# Altium PCB пульт.PcbDoc
Units mm, origin at the board's own origin, x right, y up, seen from the top; angles counter-clockwise.
Board outline 62 x 73 mm, 2 copper layers (Top Layer, Bottom Layer); 34 components, 56 nets, 201 pads, 36 vias.
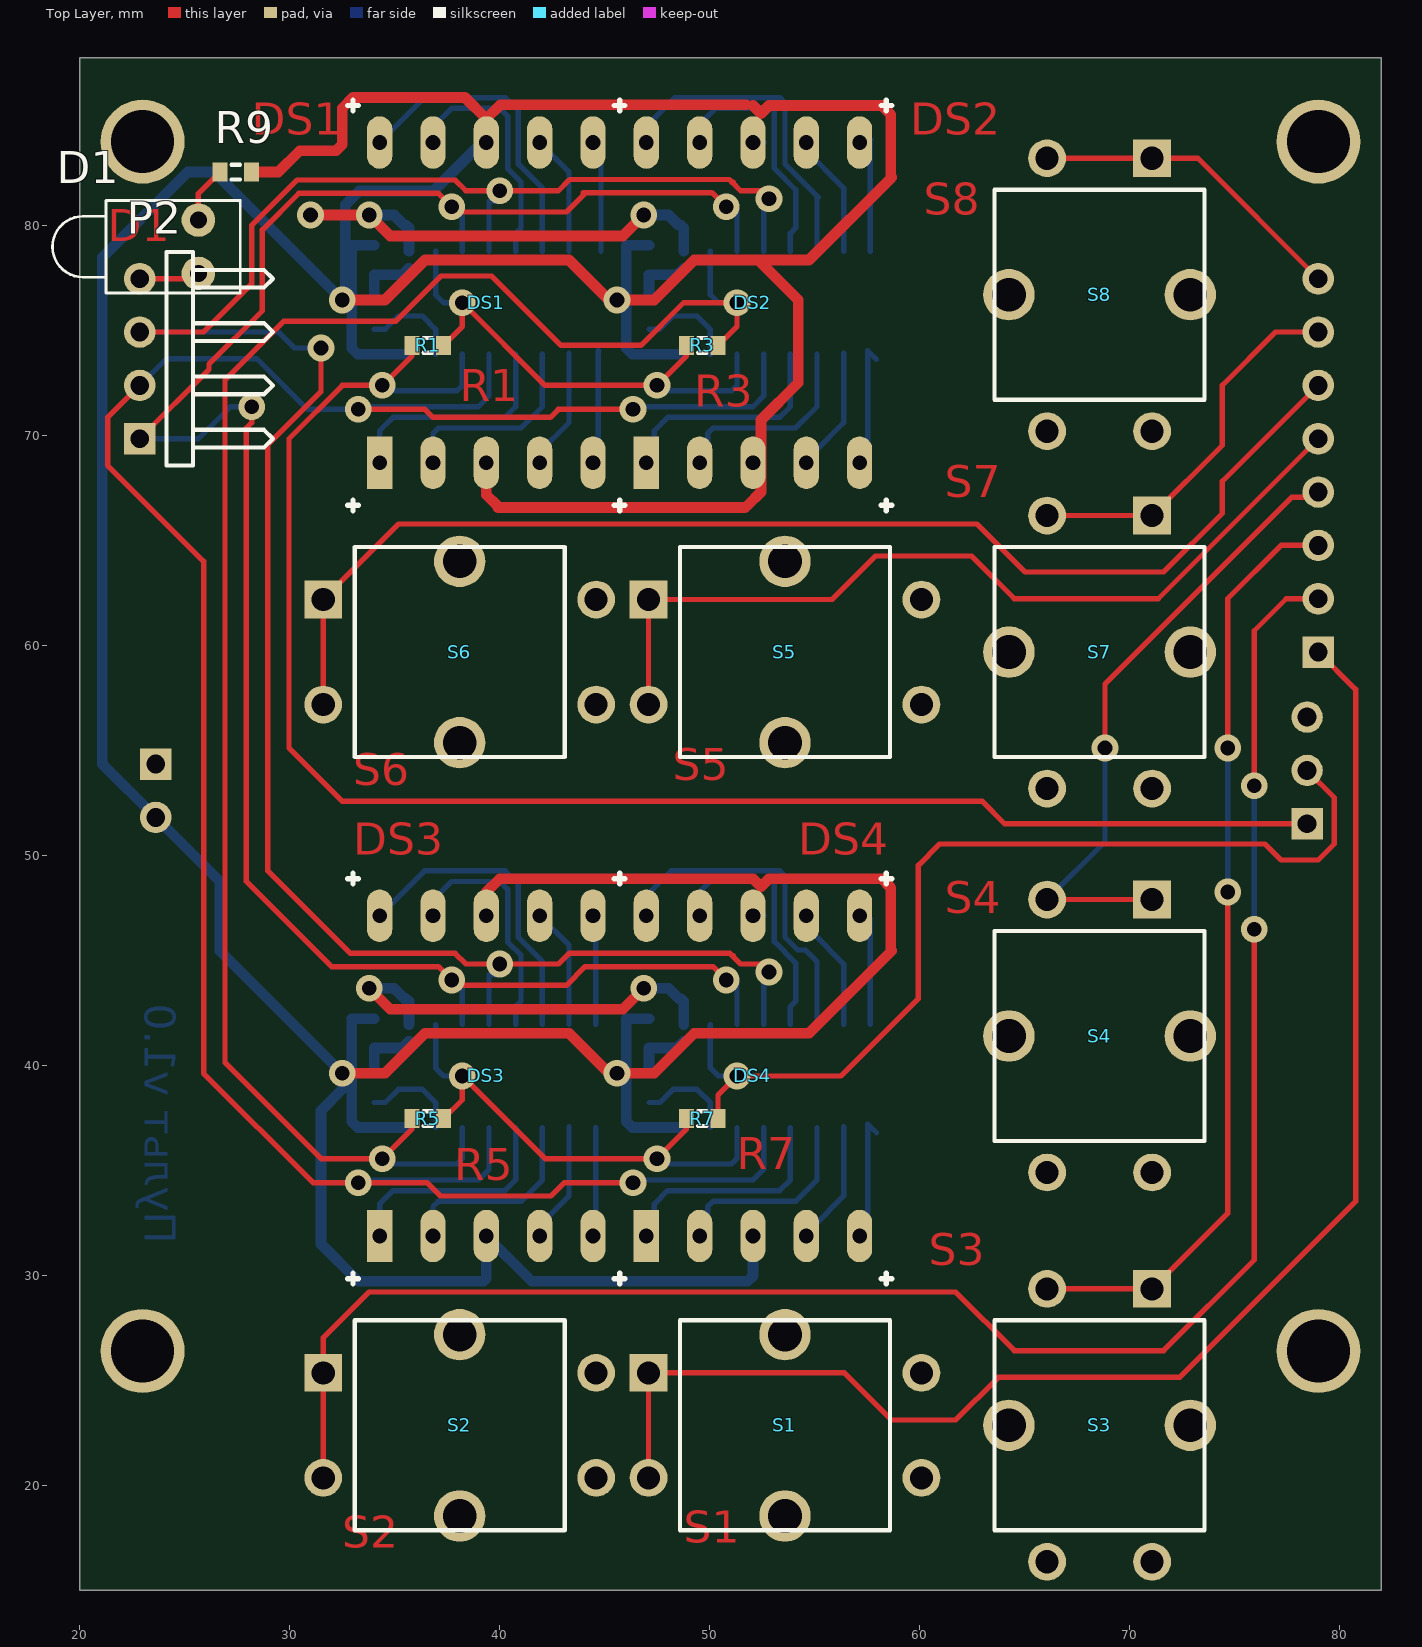
[diagram p0: Top Layer view]
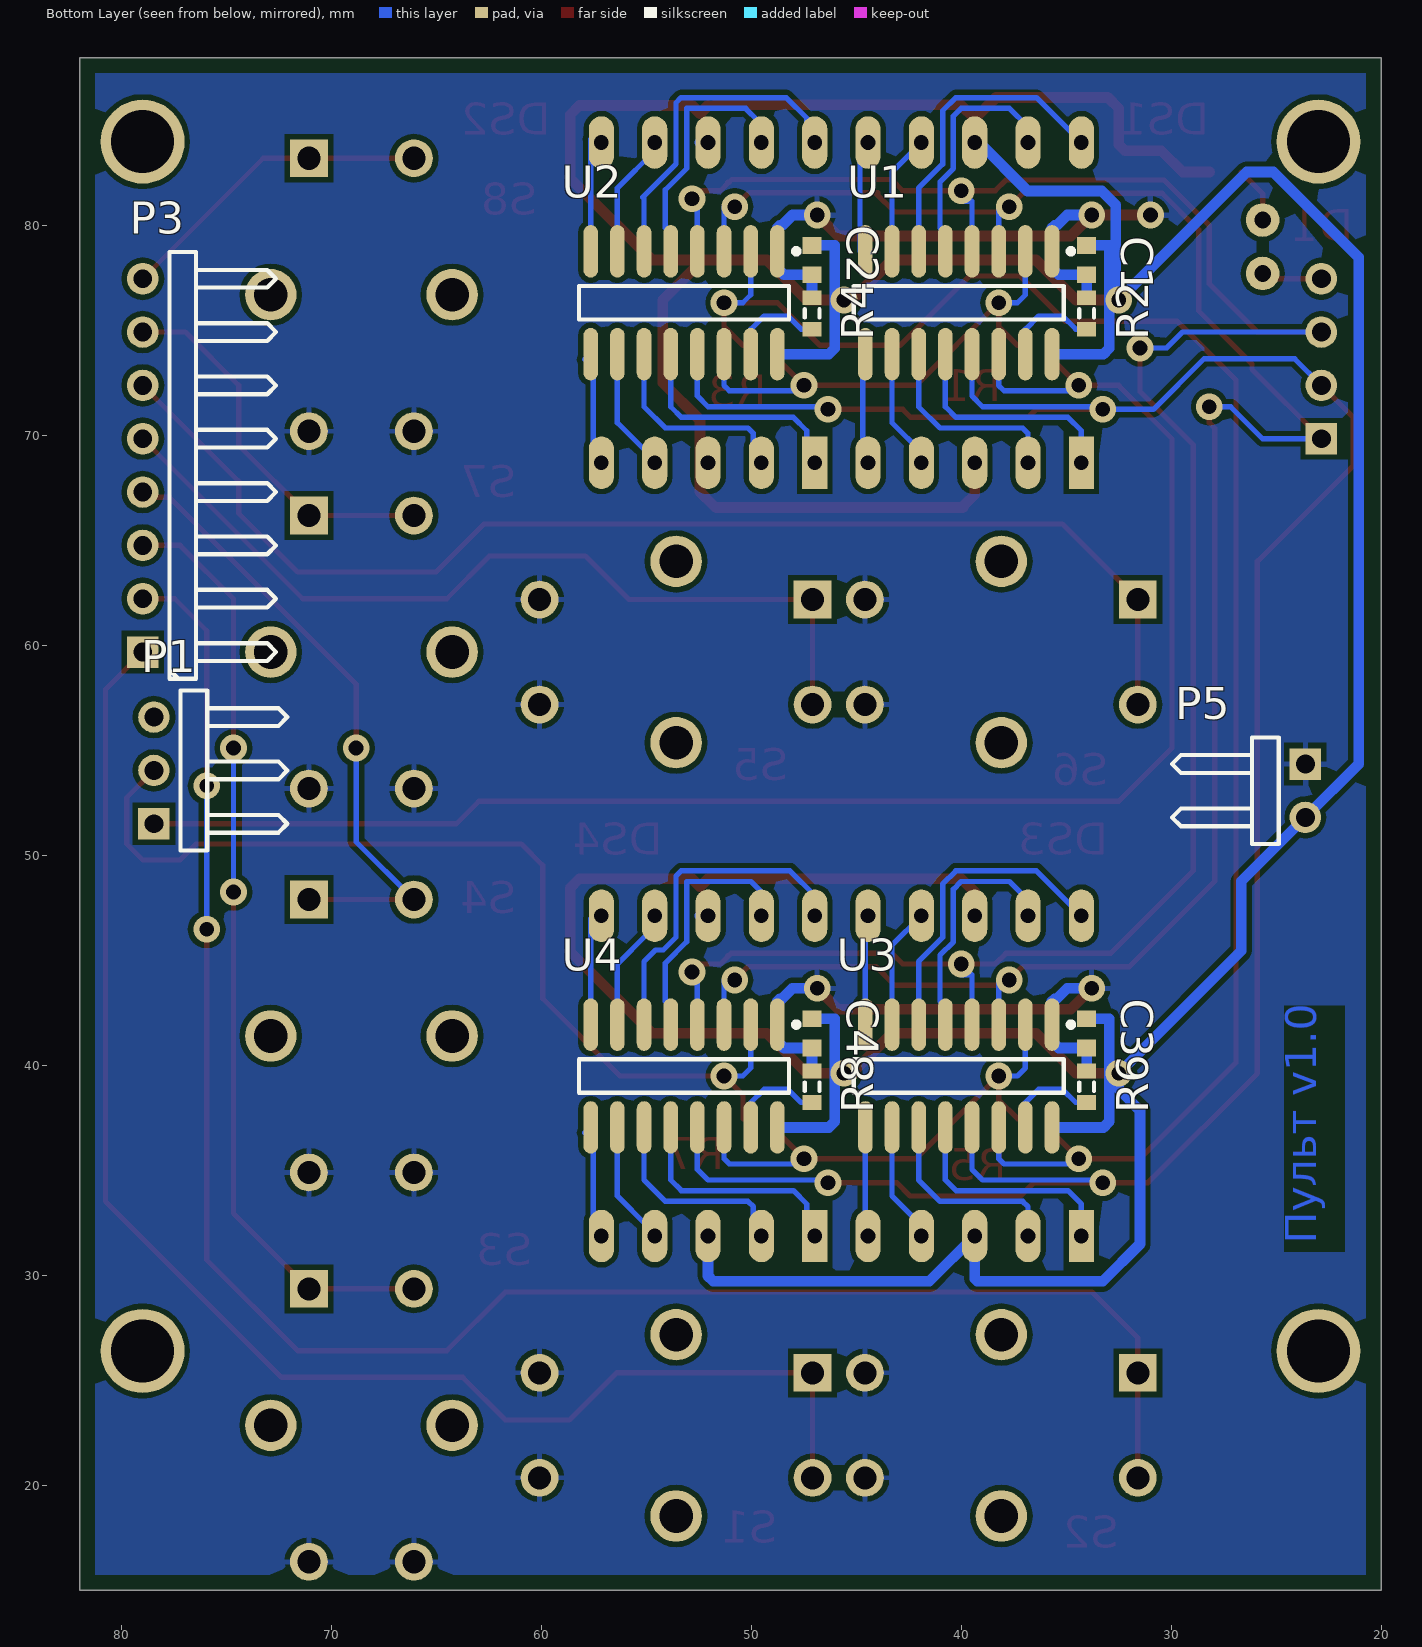
[diagram p1: Bottom Layer view, seen from below]

## Layer stack, top to bottom
Top Layer: signal copper 0.0356
Dielectric: dielectric 0.32, FR-4, Dk 4.8
Bottom Layer: signal copper 0.0356

## Board outline
20,15 82,15 82,88 20,88

## Design rules (kind name [scope] priority, off if disabled: settings)
Clearance [All] p1: gap=0.254
ComponentClearance [All] p1 off: gap=0.254 collisioncheckmode=3 verticalgap=0.254 showdistances=FALSE
PolygonConnect [All] p1: connectstyle=Relief reliefconductorwidth=0.254 reliefentries=4 polygonreliefangle="90 Angle"
RoomDefinition пульт [InComponentClass('пульт')] p1: confinementstyle=ConfineIn formatcopy=TRUE lockcomponents=FALSE outline 20.015,15.011 81.991,15.011 81.991,87.986 20.015,87.986
RoomDefinition "U_Индикатор с драйвером4" [InComponentClass('U_Индикатор с драйвером4')] p2: confinementstyle=ConfineIn formatcopy=TRUE lockcomponents=FALSE outline 43.815,29.21 60.96,29.21 60.96,50.8 43.815,50.8
RoomDefinition "U_Индикатор с драйвером3" [InComponentClass('U_Индикатор с драйвером3')] p3: confinementstyle=ConfineIn formatcopy=TRUE lockcomponents=TRUE outline 31.115,29.21 48.006,29.21 48.006,50.8 31.115,50.8
RoomDefinition "U_Индикатор с драйвером2" [InComponentClass('U_Индикатор с драйвером2')] p4: confinementstyle=ConfineIn formatcopy=TRUE lockcomponents=FALSE outline 43.815,66.04 60.96,66.04 60.96,87.63 43.815,87.63
RoomDefinition "U_Индикатор с драйвером1" [InComponentClass('U_Индикатор с драйвером1')] p5: confinementstyle=ConfineIn formatcopy=TRUE lockcomponents=TRUE outline 31.115,66.04 48.006,66.04 48.006,87.63 31.115,87.63
RoutingVias [All] p1: holewidth=0.7 width=1.27 viastyle="Through Hole" minholewidth=0.7 minwidth=1.27 maxholewidth=0.7 maxwidth=1.27
SilkscreenOverComponentPads [All] p1: minsilkscreentomaskgap=0.254
SolderMaskExpansion [All] p1: expansion=0.102
Width Width_1 [(InNet('5V') OR InNet('GND'))] p1: maxlimit=0.508 minlimit=0.508 preferedwidth=0.508
Width [All] p2: maxlimit=0.254 minlimit=0.254 preferedwidth=0.254
26 further rules are at their usual default settings.

## Classes and differential pairs
channel class "Индикатор с драйвером": "U_Индикатор с драйвером1" "U_Индикатор с драйвером2" "U_Индикатор с драйвером3" "U_Индикатор с драйвером4"
component class пульт: D1 P1 P2 P3 P5 R9 S1 S2 S3 S4 S5 S6 S7 S8
component class "U_Индикатор с драйвером4": C4 DS4 R7 R8 U4
component class "U_Индикатор с драйвером3": C3 DS3 R5 R6 U3
component class "U_Индикатор с драйвером2": C2 DS2 R3 R4 U2
component class "U_Индикатор с драйвером1": C1 DS1 R1 R2 U1

## Components (designator, comment, footprint, x,y, rotation, side; value= is the part's Value field where it differs from the comment)
C1 "Cap Semi" CAPC1608L 34.036,78.359 r90 bottom
C2 "Cap Semi" CAPC1608L 47.117,78.359 r90 bottom (schematic designator C1)
C3 "Cap Semi" CAPC1608L 34.036,41.529 r90 bottom (schematic designator C1)
C4 "Cap Semi" CAPC1608L 47.117,41.529 r90 bottom (schematic designator C1)
D1 "LED1" LED-1 25.654,78.994 r180 top
DS1 "SA52" LED52 33.02,66.675 r90 top
DS2 "SA52" LED52 45.72,66.675 r90 top (schematic designator DS1)
DS3 "SA52" LED52 33.02,29.845 r90 top (schematic designator DS1)
DS4 "SA52" LED52 45.72,29.845 r90 top (schematic designator DS1)
P1 "UART_1" HDR1X3H 78.461,51.511 r90 bottom locked
P2 "PORT_D" HDR1X4H 22.86,69.85 r90 top locked
P3 "PORT_A" HDR1X8H 78.994,59.69 r90 bottom locked
P5 "POWER" HDR1X2H 23.622,54.356 r270 bottom
R1 "0" RESC1608L 36.576,74.295 r180 top
R2 "Res3" RESC1608L 34.036,75.819 r270 bottom
R3 "0" RESC1608L 49.657,74.295 r180 top (schematic designator R1)
R4 "Res3" RESC1608L 47.117,75.819 r270 bottom (schematic designator R2)
R5 "0" RESC1608L 36.576,37.465 r180 top (schematic designator R1)
R6 "Res3" RESC1608L 34.036,38.989 r270 bottom (schematic designator R2)
R7 "0" RESC1608L 49.657,37.465 r180 top (schematic designator R1)
R8 "Res3" RESC1608L 47.117,38.989 r270 bottom (schematic designator R2)
R9 "Res3" RESC1608L 27.432,82.55 r180 top
S1 "SWT-9" SWT-9 53.594,22.86 r0 top
S2 "SWT-9" SWT-9 38.1,22.86 r0 top
S3 "SWT-9" SWT-9 68.58,22.86 r270 top
S4 "SWT-9" SWT-9 68.58,41.402 r270 top
S5 "SWT-9" SWT-9 53.594,59.69 r0 top
S6 "SWT-9" SWT-9 38.1,59.69 r0 top
S7 "SWT-9" SWT-9 68.58,59.69 r270 top
S8 "SWT-9" SWT-9 68.58,76.708 r270 top
U1 "MBI5168" SO-16_M 40.132,76.327 r270 bottom
U2 "MBI5168" SO-16_M 53.213,76.327 r270 bottom (schematic designator U1)
U3 "MBI5168" SO-16_M 40.132,39.497 r270 bottom (schematic designator U1)
U4 "MBI5168" SO-16_M 53.213,39.497 r270 bottom (schematic designator U1)

## Footprints (in the part's own frame and the unit in brackets; to place one, negate y for a bottom-side part, rotate by r counter-clockwise, add the part's x,y. Pads: shape width x height; smd on the part's side, far side on the other; paste and mask are expansions set on the pad)
CAPC1608L [mm] "Chip Capacitor, Body 1.6x0.8mm, IPC High Density"
  rect 0.8x0.9 smd: 1(-0.7,0) 2(0.7,0)
  body extent -0.87,-0.48 0.87,0.48, height 1.3
HDR1X2H [mm] "Connector; Header; 2 Position; Right Angle"
  rect 1.5x1.5 hole 0.9: 1(0,0)
  round 1.5 hole 0.9: 2(2.54,0)
  silkscreen extent -1.27,-6.35 3.81,-1.27
HDR1X3H [mm] "Connector; Header; 3 Position; Right Angle"
  rect 1.5x1.5 hole 0.9: 1(0,0)
  round 1.5 hole 0.9: 2(2.54,0) 3(5.08,0)
  silkscreen extent -1.27,-6.35 6.35,-1.27
HDR1X4H [mm] "Connector; Header; 4 Position; Right Angle"
  rect 1.5x1.5 hole 0.9: 1(0,0)
  round 1.5 hole 0.9: 2(2.54,0) 3(5.08,0) 4(7.62,0)
  silkscreen extent -1.27,-6.35 8.89,-1.27
HDR1X8H [mm] "Connector; Header; 8 Position; Right Angle"
  rect 1.5x1.5 hole 0.9: 1(0,0)
  round 1.5 hole 0.9: 2(2.54,0) 3(5.08,0) 4(7.62,0) 5(10.16,0) 6(12.7,0) 7(15.24,0) 8(17.78,0)
  silkscreen extent -1.27,-6.35 19.05,-1.27
LED52 [mm]
  rect 2.5x1.2 hole 0.7: 1(2.032,-1.27)
  oval 2.5x1.2 hole 0.7: 2(2.032,-3.81) 3(2.032,-6.35) 4(2.032,-8.89) 5(2.032,-11.43) 6(17.282,-11.43) 7(17.282,-8.89) 8(17.282,-6.35) 9(17.282,-3.81) 10(17.282,-1.27)
  silkscreen extent -0.25,-12.95 19.3,0.25, body extent 0,-12.7 19.05,0, height 8
LED-1 [mm] "Typical RED GaAs LED; 2 Leads"
  round 1.6 hole 0.8: 1(0,1.27) 2(0,-1.27)
  silkscreen extent -2,-2.2 6.95,2.2
RESC1608L [mm] "Chip Resistor, Body 1.6x0.8mm, IPC High Density"
  rect 0.7x0.9 smd: 1(-0.75,0) 2(0.75,0)
  silkscreen extent -0.2,-0.35 0.2,0.35, body extent -0.85,-0.48 0.85,0.48, height 0.9
SO-16_M [mm] "16-Pin Small Outline Integrated Circuit 1.27 mm Pitch, IPC Low Density"
  oval 2.5x0.7 smd: 1(-2.45,4.445) 2(-2.45,3.175) 3(-2.45,1.905) 4(-2.45,0.635) 5(-2.45,-0.635) 6(-2.45,-1.905) 7(-2.45,-3.175) 8(-2.45,-4.445) 9(2.45,-4.445) 10(2.45,-3.175) 11(2.45,-1.905) 12(2.45,-0.635) 13(2.45,0.635) 14(2.45,1.905) 15(2.45,3.175) 16(2.45,4.445)
  silkscreen extent -2.57,-5 0.8,5.47, body extent -2,-5 2,5, height 1.75
SWT-9 [mm]
  rect 1.8x1.8 hole 1.1: 1(-6.5,2.5)
  round 1.8 hole 1.1: 2(-6.5,-2.5) 3(6.5,-2.5) 4(6.5,2.5)
  round 2.45 hole 1.6: 4(0,4.318) 5(0,-4.318)
  silkscreen extent -5,-5 5,5

## Part data
C1 C2 C3 C4: "Capacitor (Semiconductor SIM Model)"
D1: "Typical RED GaAs LED"
DS1 DS2 DS3 DS4: library part SA52-11, "KingBright, SA23-11"
P1: library part "Header 3H", "Header, 3-Pin, Right Angle"
P2: library part "Header 4H", "Header, 4-Pin, Right Angle"
P3: library part "Header 8H", "Header, 8-Pin, Right Angle"
P5: library part "Header 2H", "Header, 2-Pin, Right Angle"
R1 R3 R5 R7: library part Res3, "Resistor"
R2 R4 R6 R8 R9: "Resistor"
S1 S2 S3 S4 S5 S6 S7 S8: "Switch"
U1 U2 U3 U4: "Macroblock, 8-bit Constant Current LED Sink Driver"

## Free pads (board coordinates)
  round 4 hole 3: 0(23,26.4) 1(79,26.4) 2(79,84) 3(23,84)

## Via types
v1: diameter 1.27, hole 0.7, Top Layer to Bottom Layer, 36 vias

## Nets (pads, with @x,y where several pads share a name; then routed paths per layer and width w, separated by ;. In a path a pad name is that pad's centre, name@x,y a point inside that pad or via, vN(x,y) a via of type N, cw(c..) or ccw(c..) an arc to the next point about the centre after c; other vN are vias at no path point)
5V: C1.2 C2.2 C3.2 C4.2 DS1.3 DS1.8 DS2.3 DS2.8 DS3.3 DS3.8 DS4.3 DS4.8 P5.2 R9.1 U1.16 U2.16 U3.16 U4.16 | length 290.3
  Top Layer w0.508: R9.1 29.464,82.55 30.48,83.566 32.213,83.566 32.511,83.864 32.511,85.597 33.02,86.106 38.354,86.106 DS1.8@39.37,85.09 ; v1(32.512,39.624) 34.544,39.624 36.449,41.529 43.307,41.529 v1@45.212,39.624 ; v1(32.512,76.454) 34.544,76.454 36.449,78.359 43.307,78.359 v1@45.212,76.454 ; DS3.8@39.37,48.26 40.005,48.895 52.07,48.895 52.451,48.514 52.832,48.895 58.199,48.895 58.639,48.455 58.639,45.501 ; DS1.3 39.37,67.183 39.878,66.675 ; DS1.8 DS1.8@39.37,85.09 ; 39.924,66.576 51.689,66.576 ; 40.005,85.725 DS1.8@39.37,85.09 ; 40.051,85.753 51.735,85.753 ; v1(45.593,39.624) 47.371,39.624 49.276,41.529 54.737,41.529 58.674,45.466 ; v1(45.593,76.454) 47.371,76.454 49.276,78.359 52.324,78.359 ; 51.816,66.675 52.451,67.31 52.451,70.739 54.229,72.517 54.229,76.454 52.324,78.359 ; 52.07,85.725 52.451,85.344 52.832,85.725 58.199,85.725 58.639,85.285 58.639,82.331 58.674,82.296 54.737,78.359 52.324,78.359
  Bottom Layer w0.508: v1@32.649,39.761 v1(32.512,39.624) ; C3.2 32.958,42.229 32.958,37.329 33.24,37.047 U3.16 ; C1.2 32.958,79.059 32.958,74.159 33.24,73.877 U1.16 ; DS3.8@39.161,47.127 DS3.8 ; DS1.8 39.161,83.957 36.855,81.651 33.318,81.651 32.649,80.982 32.649,76.591 v1(32.512,76.454) 26.416,82.55 25.146,82.55 21.082,78.486 21.082,54.356 P5.2 26.67,48.768 26.67,45.466 v1(32.512,39.624) ; C4.2 46.039,42.229 46.039,37.329 46.321,37.047 U4.16 ; C2.2 46.039,79.059 46.039,74.159 46.321,73.877 U2.16 ; DS4.3@52.07,31.496 52.07,29.972 51.816,29.718 41.529,29.718 DS3.3 39.37,29.845 39.243,29.718 33.274,29.718 31.496,31.496 31.496,37.846 32.512,38.862 v1(32.512,39.624) ; DS4.8@52.242,47.127 DS4.8@52.451,47.127 ; DS2.8@52.242,83.957 DS2.8@52.451,83.957
\O\E: P2.2 U1.13 U2.13 U3.13 U4.13 | length 117.1
  Top Layer w0.254: P2.2 21.336,70.866 21.336,68.58 25.908,64.008 25.908,39.624 31.115,34.417 v1(33.274,34.417) 36.544,34.417 37.179,33.782 42.45,33.782 43.085,34.417 v1(46.355,34.417) ; v1(33.274,71.247) 36.449,71.247 36.83,70.866 42.418,70.866 42.799,71.247 v1@45.974,71.247
  Bottom Layer w0.254: P2.2 24.13,73.66 28.448,73.66 30.861,71.247 v1(33.274,71.247) ; v1@33.274,34.544 38.989,34.544 39.497,35.052 U3.13 ; v1@33.274,71.374 38.989,71.374 39.497,71.882 U1.13 ; v1@46.355,34.544 52.07,34.544 52.578,35.052 U4.13 ; v1@46.355,71.374 52.07,71.374 52.578,71.882 U2.13
  other v1: 46.355,71.247
CLK: P2.1 U1.3 U2.3 U3.3 U4.3 | length 99.6
  Top Layer w0.254: P2.1 26.162,73.152 26.162,73.406 28.702,75.946 28.702,79.8 30.436,81.534 37.084,81.534 v1(37.719,80.899) 37.973,80.645 43.18,80.645 44.069,81.534 ; v1(28.194,71.374) 28.194,70.612 27.94,70.358 27.94,48.768 32.004,44.704 37.084,44.704 v1(37.719,44.069) 37.973,43.815 43.18,43.815 44.069,44.704 50.165,44.704 v1(50.8,44.069) v1@51.054,43.815 ; 43.988,81.562 50.084,81.562 ; 50.165,81.534 v1(50.8,80.899) v1@51.054,80.645
  Bottom Layer w0.254: P2.1 25.654,69.85 27.178,71.374 v1(28.194,71.374) ; U3.3 v1@38.227,44.069 ; U1.3 v1@38.227,80.899 ; U4.3 v1@51.308,44.069 ; U2.3 v1@51.308,80.899
GND: C1.1 C2.1 C3.1 C4.1 P5.1 R2.1 R4.1 R6.1 R8.1 S1.3 S1.4@60.094,25.36 S2.3 S2.4@44.6,25.36 S3.3 S3.4@71.08,16.36 S4.3 S4.4@71.08,34.902 S5.3 S5.4@60.094,62.19 S6.3 S6.4@44.6,62.19 S7.3 S7.4@71.08,53.19 S8.3 S8.4@71.08,70.208 U1.1 U2.1 U3.1 U4.1 | length 55.2
  Top Layer w0.508: v1(30.998,80.508) v1(33.792,80.508) 34.798,79.502 45.866,79.502 v1(46.873,80.508) ; v1(33.792,43.678) 34.798,42.672 45.866,42.672 v1(46.873,43.678)
  Bottom Layer w0.508: v1(33.792,43.678) 34.969,43.678 35.468,43.18 35.56,43.18 35.687,43.053 U3.1 ; v1(33.792,80.508) 34.969,80.508 35.468,80.01 35.56,80.01 35.687,79.883 U1.1 ; R6.1 C3.1 35.371,40.829 U3.1@35.687,41.145 ; R2.1 C1.1 35.371,77.659 U1.1@35.687,77.975 ; v1(46.873,43.678) 48.05,43.678 48.549,43.18 48.641,43.18 48.768,43.053 U4.1 ; v1(46.873,80.508) 48.05,80.508 48.549,80.01 48.641,80.01 48.768,79.883 U2.1 ; R8.1 C4.1 48.452,40.829 U4.1@48.768,41.145 ; R4.1 C2.1 48.452,77.659 U2.1@48.768,77.975
KEY1: P3.1 S1.1 S1.2 | length 70.8
  Top Layer w0.254: S1.2 S1.1 56.428,25.36 58.674,23.114 61.722,23.114 63.754,25.146 72.39,25.146 80.772,33.528 80.772,57.912 P3.1
KEY2: P3.2 S2.1 S2.2 | length 88.5
  Top Layer w0.254: S2.2 S2.1 31.6,27.028 33.782,29.21 61.722,29.21 64.516,26.416 71.628,26.416 75.946,30.734 v1(75.946,46.482) ; v1(75.946,53.315) 75.946,60.706 77.47,62.23 P3.2
  Bottom Layer w0.254: v1(75.946,46.482) v1(75.946,53.315)
KEY3: P3.3 S3.1 S3.2 | length 44.7
  Top Layer w0.254: S3.2 S3.1 74.676,32.956 v1(74.676,48.26) ; v1(74.676,55.118) 74.676,62.23 77.216,64.77 P3.3
  Bottom Layer w0.254: v1(74.676,48.26) v1(74.676,55.118)
KEY4: P3.4 S4.1 S4.2 | length 30.4
  Top Layer w0.254: S4.2 S4.1 ; v1(68.834,55.118) 68.834,58.166 77.724,67.056 78.74,67.056 P3.4
  Bottom Layer w0.254: S4.2 68.834,50.656 v1(68.834,55.118)
KEY5: P3.5 S5.1 S5.2 | length 41.8
  Top Layer w0.254: S5.2 S5.1 55.84,62.19 57.912,64.262 62.484,64.262 64.516,62.23 71.374,62.23 P3.5
KEY6: P3.6 S6.1 S6.2 | length 59.2
  Top Layer w0.254: S6.1@31.241,61.831 31.6,61.472 S6.2 ; S6.1 35.196,65.786 62.738,65.786 65.024,63.5 71.628,63.5 74.422,66.294 74.422,67.818 P3.6
KEY7: P3.7 S7.1 S7.2 | length 18.2
  Top Layer w0.254: S7.2 S7.1 74.422,69.532 74.422,72.39 76.962,74.93 P3.7
KEY8: P3.8 S8.1 S8.2 | length 15.3
  Top Layer w0.254: S8.2 S8.1 73.256,83.208 P3.8
LE: P2.3 U1.4 U2.4 U3.4 U4.4 | length 112.4
  Top Layer w0.254: P2.3 25.908,74.93 28.194,77.216 28.194,80.01 30.353,82.169 37.886,82.169 38.394,81.661 v1(40.005,81.661) 42.799,81.661 43.307,82.169 ; v1(31.496,74.168) 31.496,72.092 28.956,69.552 28.956,49.276 32.893,45.339 37.886,45.339 38.394,44.831 v1(40.005,44.831) 42.799,44.831 43.307,45.339 50.967,45.339 51.066,45.24 ; 43.353,82.197 50.939,82.197 ; 50.967,82.169 51.066,82.07 ; 51.14,45.24 51.066,45.24 ; 51.14,82.07 51.066,82.07 ; v1(52.832,44.45) 52.832,44.577 53.086,44.831 51.475,44.831 51.066,45.24 ; v1(52.832,81.28) 52.832,81.407 53.086,81.661 51.475,81.661 51.066,82.07
  Bottom Layer w0.254: P2.3 29.464,74.93 30.226,74.168 v1(31.496,74.168) ; U3.4 39.497,44.323 40.005,44.323 v1(40.005,44.831) ; U1.4 39.497,81.153 40.005,81.153 v1(40.005,81.661) ; U4.4 52.578,44.323 53.086,44.323 53.086,44.831 52.832,44.577 v1(52.832,44.45) ; U2.4 52.578,81.153 53.086,81.153 53.086,81.661 52.832,81.407 v1(52.832,81.28)
LED: D1.1 P2.4 | length 2.9
  Top Layer w0.254: P2.4 25.4,77.47 D1.1
NetD1_2: D1.2 R9.2 | length 2.7
  Top Layer w0.254: D1.2 25.654,81.522 R9.2
NetDS1_1: DS1.1 U1.12 | length 11
  Bottom Layer w0.254: DS1.1 34.29,70.231 34.925,70.866 40.259,70.866 40.767,71.374 U1.12
NetDS1_2: DS1.2 U1.11 | length 9.6
  Bottom Layer w0.254: DS1.2 36.83,70.104 37.084,70.358 41.021,70.358 42.037,71.374 U1.11
NetDS1_4: DS1.4 U1.10 | length 5.7
  Bottom Layer w0.254: DS1.4 41.91,69.215 43.307,70.612 ; 43.307,70.649 U1.10 U1.10@43.307,73.914
NetDS1_5: DS1.5 U1.9 | length 5.4
  Bottom Layer w0.254: DS1.5@44.704,68.707 44.704,73.877 44.704,74.041 U1.9@44.722,74.023
NetDS1_6: DS1.6 U1.8 | length 5.3
  Bottom Layer w0.254: U1.8@44.831,78.777 44.831,83.957 DS1.6@44.831,84.111
NetDS1_7: DS1.7 U1.7 | length 5.8
  Bottom Layer w0.254: DS1.7 43.307,82.56 U1.7
NetDS1_9: DS1.9 U1.5 | length 11.6
  Bottom Layer w0.254: DS1.9 36.83,84.709 37.709,85.588 40.015,85.588 40.386,85.217 40.386,82.717 41.021,82.082 41.021,79.883 40.767,79.629 U1.5
NetDS1_10: DS1.10 U1.6 | length 14.9
  Bottom Layer w0.254: DS1.10 36.429,86.096 40.269,86.096 40.894,85.471 40.894,82.927 42.037,81.784 U1.6
NetDS2_1: DS2.1 U2.12 | length 11
  Bottom Layer w0.254: DS2.1@47.371,68.707 47.371,70.231 48.006,70.866 53.34,70.866 53.848,71.374 U2.12
NetDS2_2: DS2.2 U2.11 | length 9.6
  Bottom Layer w0.254: DS2.2@49.911,68.707 49.911,70.104 50.165,70.358 54.102,70.358 55.118,71.374 U2.11
NetDS2_4: DS2.4 U2.10 | length 5.7
  Bottom Layer w0.254: DS2.4@54.991,68.707 54.991,69.215 56.388,70.612 ; 56.388,70.649 U2.10 U2.10@56.388,73.914
NetDS2_5: DS2.5 U2.9 | length 5.9
  Bottom Layer w0.254: DS2.5@57.531,68.707 57.531,73.877 57.531,74.041 57.676,73.896 U2.9@57.949,73.623
NetDS2_6: DS2.6 U2.8 | length 5.4
  Bottom Layer w0.254: U2.8 57.658,83.957 57.658,84.111 DS2.6@57.672,84.098
NetDS2_7: DS2.7 U2.7 | length 6.1
  Bottom Layer w0.254: DS2.7@54.991,83.957 54.61,83.576 54.61,83.566 56.388,81.788 U2.7
NetDS2_9: DS2.9 U2.5 | length 11.4
  Bottom Layer w0.254: DS2.9@49.911,84.709 49.657,84.963 50.282,85.588 53.086,85.588 53.086,82.725 54.102,81.709 54.102,79.883 53.848,79.629 U2.5
NetDS2_10: DS2.10 U2.6 | length 15.6
  Bottom Layer w0.254: DS2.10@47.371,83.957 47.371,85.118 48.349,86.096 53.35,86.096 53.594,85.852 53.594,82.936 55.184,81.346 ; U2.6 55.118,81.28
NetDS3_1: DS3.1 U3.12 | length 11
  Bottom Layer w0.254: DS3.1 34.29,33.401 34.925,34.036 40.259,34.036 40.767,34.544 U3.12
NetDS3_2: DS3.2 U3.11 | length 9.6
  Bottom Layer w0.254: DS3.2 36.83,33.274 37.084,33.528 41.021,33.528 42.037,34.544 U3.11
NetDS3_4: DS3.4 U3.10 | length 5.7
  Bottom Layer w0.254: DS3.4 41.91,32.385 43.307,33.782 ; 43.307,33.819 U3.10 U3.10@43.307,37.084
NetDS3_5: DS3.5 U3.9 | length 5.2
  Bottom Layer w0.254: DS3.5 44.577,32.004 U3.9
NetDS3_6: DS3.6 U3.8 | length 5.2
  Bottom Layer w0.254: DS3.6 44.577,47 U3.8
NetDS3_7: DS3.7 U3.7 | length 5.8
  Bottom Layer w0.254: DS3.7 43.307,45.73 U3.7
NetDS3_9: DS3.9 U3.5 | length 11.6
  Bottom Layer w0.254: DS3.9 36.83,47.879 37.709,48.758 40.015,48.758 40.386,48.387 40.386,45.887 41.021,45.252 41.021,43.053 40.767,42.799 U3.5
NetDS3_10: DS3.10 U3.6 | length 14.9
  Bottom Layer w0.254: DS3.10 36.429,49.266 40.269,49.266 40.894,48.641 40.894,46.097 42.037,44.954 U3.6
NetDS4_1: DS4.1 U4.12 | length 11
  Bottom Layer w0.254: DS4.1@47.371,31.877 47.371,33.401 48.006,34.036 53.34,34.036 53.848,34.544 U4.12
NetDS4_2: DS4.2 U4.11 | length 9.6
  Bottom Layer w0.254: DS4.2@49.911,31.877 49.911,33.274 50.165,33.528 54.102,33.528 55.118,34.544 U4.11
NetDS4_4: DS4.4 U4.10 | length 5.7
  Bottom Layer w0.254: DS4.4@54.991,31.877 54.991,32.385 56.388,33.782 ; 56.388,33.819 U4.10 U4.10@56.388,37.084
NetDS4_5: DS4.5 U4.9 | length 5.9
  Bottom Layer w0.254: DS4.5@57.531,31.877 57.531,37.047 57.531,37.211 57.676,37.066 U4.9@57.949,36.793
NetDS4_6: DS4.6 U4.8 | length 5.3
  Bottom Layer w0.254: DS4.6@57.394,46.99 57.658,46.99 U4.8
NetDS4_7: DS4.7 U4.7 | length 5.8
  Bottom Layer w0.254: DS4.7@54.991,47.127 54.991,46.228 56.388,44.831 U4.7
NetDS4_9: DS4.9 U4.5 | length 12.4
  Bottom Layer w0.254: DS4.9@49.911,47.127 49.53,47.508 49.53,48.26 50.028,48.758 53.086,48.758 53.086,45.895 54.102,44.879 54.102,43.053 53.848,42.799 U4.5
NetDS4_10: DS4.10 U4.6 | length 16.2
  Bottom Layer w0.254: DS4.10@47.371,47.127 46.99,47.508 46.99,48.092 48.164,49.266 53.35,49.266 53.594,49.022 53.594,46.106 54.204,45.496 54.576,45.496 55.118,44.954 U4.6
NetR1_1: R1.1 R3.2 U1.2 U2.14 | length 24.4
  Top Layer w0.254: R1.1 38.227,75.196 v1(38.227,76.327) 42.164,72.39 v1@47.117,72.39 ; v1(47.498,72.39) 48.907,73.799 R3.2
  Bottom Layer w0.254: U1.2 36.957,76.708 37.338,76.327 v1(38.227,76.327) ; v1(47.498,72.39) 47.752,72.136 51.054,72.136 51.308,72.39 U2.14
NetR2_2: R2.2 U1.15 | length 4.6
  Bottom Layer w0.254: R2.2 34.556,75.069 35.179,75.692 36.322,75.692 36.957,75.057 U1.15
NetR3_1: R3.1 R5.2 U2.2 U3.14 | length 84.4
  Top Layer w0.254: R5.2 35.826,36.969 v1(34.417,35.56) 31.496,35.56 26.924,40.132 26.924,72.644 29.718,75.438 35.052,75.438 37.211,77.597 39.624,77.597 42.926,74.295 46.736,74.295 48.768,76.327 v1(51.308,76.327) 51.308,75.196 R3.1
  Bottom Layer w0.254: v1(34.417,35.56) 34.671,35.306 37.973,35.306 38.227,35.56 U3.14 ; U2.2 50.038,76.708 50.419,76.327 v1(51.308,76.327)
NetR4_2: R4.2 U2.15 | length 4.6
  Bottom Layer w0.254: R4.2 47.637,75.069 48.26,75.692 49.403,75.692 50.038,75.057 U2.15
NetR5_1: R5.1 R7.2 U3.2 U4.14 | length 24.8
  Top Layer w0.254: R5.1 38.227,38.366 v1(38.227,39.497) 42.164,35.56 v1(47.498,35.56) 48.907,36.969 R7.2
  Bottom Layer w0.254: U3.2 36.957,39.878 37.338,39.497 v1(38.227,39.497) ; v1(47.498,35.56) 47.752,35.306 51.054,35.306 51.308,35.56 U4.14
NetR6_2: R6.2 U3.15 | length 4.6
  Bottom Layer w0.254: R6.2 34.556,38.239 35.179,38.862 36.322,38.862 36.957,38.227 U3.15
NetR8_2: R8.2 U4.15 | length 4.6
  Bottom Layer w0.254: R8.2 47.637,38.239 48.26,38.862 49.403,38.862 50.038,38.227 U4.15
SDI: P1.2 R7.1 U4.2 | length 47.3
  Top Layer w0.254: R7.1 50.407,38.596 v1(51.308,39.497) 56.261,39.497 59.944,43.18 59.944,49.53 60.96,50.546 76.454,50.546 77.216,49.784 78.994,49.784 79.756,50.546 79.756,52.756 P1.2
  Bottom Layer w0.254: U4.2 50.038,39.878 50.419,39.497 v1(51.308,39.497)
SDO: P1.1 R1.2 U1.14 | length 78.2
  Top Layer w0.254: R1.2 35.826,73.799 v1(34.417,72.39) 32.512,72.39 29.972,69.85 29.972,55.118 32.512,52.578 62.992,52.578 64.059,51.511 P1.1
  Bottom Layer w0.254: v1(34.417,72.39) 34.671,72.136 37.973,72.136 38.227,72.39 U1.14
pads on no net: P1.3 S1.4@53.594,27.178 S1.5 S2.4@38.1,27.178 S2.5 S3.4@72.898,22.86 S3.5 S4.4@72.898,41.402 S4.5 S5.4@53.594,64.008 S5.5 S6.4@38.1,64.008 S6.5 S7.4@72.898,59.69 S7.5 S8.4@72.898,76.708 S8.5

## Polygon pours and split planes (outlines as drawn)
GND on Bottom Layer "Bottom Layer-No Net" (solid, pour order 1000): 20.75,87.25 81.25,87.25 81.25,15.75 20.75,15.75

## Other copper
Top Layer:
  text "D1" at 21.336,79.248 h1.52
Bottom Layer:
  text "Пульт v1.0" at 22.606,31.496 h2.54 r270

## Silkscreen, mask and mechanical layers (free items; w line width, h text height)
Mechanical 2:
  lines w0.254: 19.746,15 20.254,15 ; 19.746,88 20.254,88 ; 20,14.746 20,15.254 ; 20,87.746 20,88.254 ; 81.746,15 82.254,15 ; 81.746,88 82.254,88 ; 82,14.746 82,15.254 ; 82,87.746 82,88.254
  text "20,88 (mm)" at 20.254,88 h1.52
  text "82,88 (mm)" at 82.254,88 h1.52
  text "20,15 (mm)" at 20.254,15 h1.52
  text "82,15 (mm)" at 82.254,15 h1.52
border:
  the board outline again, w0.254